# EAGLE board 10LED (EAGLE 6.4)
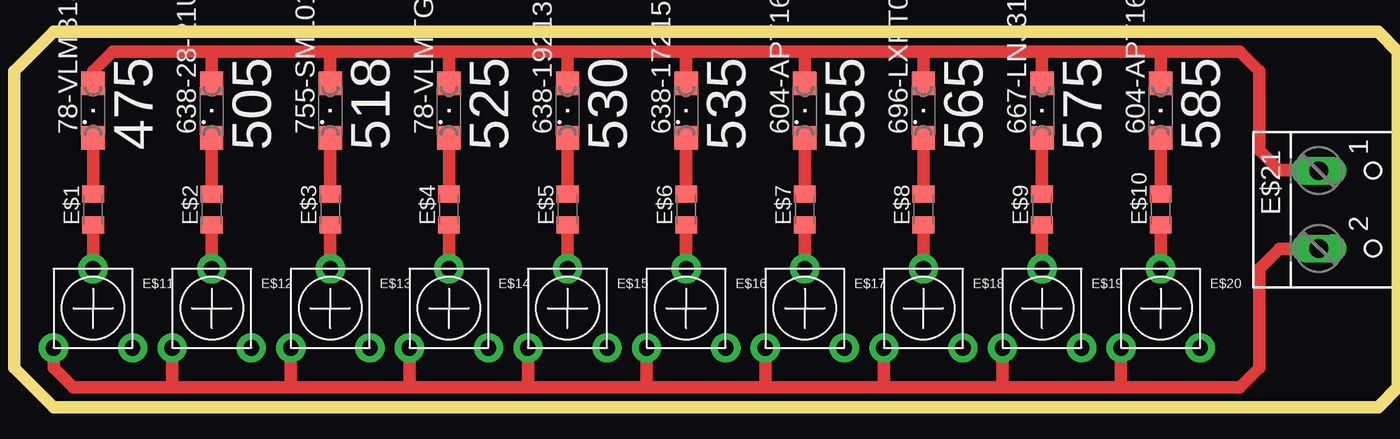
[diagram p0: board, top side]

No outline drawn. Coordinates in mm, seen from the top.
Copper layers (1*16): Top 0.035mm / dielectric 1.5mm / Bottom 0.035mm
Design rules "default": minimum track width 10mil, minimum drill 24mil, track to track 8mil, track to pad 8mil, pad to pad 8mil, via to via 8mil, smd to smd 8mil, copper to edge 40mil, drill to drill 8mil, minimum pad ring 10mil, minimum via ring 8mil, stop-mask expansion 4mil, vias tented up to drill 0mil, thermal gap 10mil
Milling: 8 lines

## Footprints (pad centres in the part's own frame; a part is rotated, then mirrored left to right if it is on the bottom)
SML1206 = smd 1.5 x 1.5: A 1.75,0; C -1.75,0
C0805K = smd 1.1 x 1.4: 1 -1,0; 2 1,0
TRIM_POT_PTH = drill 1 pad 1.88: 1 -2.54,-2.54; 2 0,2.54; 3 2.54,-2.54
W237-102 = drill 1.194 long: 1 -2.5,-1.27; 2 2.5,-1.27

## Placement (x,y rotation side)
78-VLMB1300-GS08  475  [SML1206]  8.89,12.7 90 top
78-VLMTG1300-GS08  525nm  [SML1206]  31.75,12.7 90 top
604-APT1608PGW  555  [SML1206]  54.61,12.7 90 top
604-APT1608PYW  585  [SML1206]  77.47,12.7 90 top
638-28-21UBGC  505nm  [SML1206]  16.51,12.7 90 top
638-17215GHCYR1S23T  535  [SML1206]  46.99,12.7 90 top
638-19213GHCXS1T1N3T  530  [SML1206]  39.37,12.7 90 top
667-LNJ314G83RA  575  [SML1206]  69.85,12.7 90 top
696-LXFT0603GC-TR  565  [SML1206]  62.23,12.7 90 top
755-SML012ECTT86  518nm  [SML1206]  24.13,12.7 90 top
E$1  [C0805K]  8.89,6.35 90 top
E$2  [C0805K]  16.51,6.35 90 top
E$3  [C0805K]  24.13,6.35 90 top
E$4  [C0805K]  31.75,6.35 90 top
E$5  [C0805K]  39.37,6.35 90 top
E$6  [C0805K]  46.99,6.35 90 top
E$7  [C0805K]  54.61,6.35 90 top
E$8  [C0805K]  62.23,6.35 90 top
E$9  [C0805K]  69.85,6.35 90 top
E$10  [C0805K]  77.47,6.35 90 top
E$11  [TRIM_POT_PTH]  8.89,0 0 top
E$12  [TRIM_POT_PTH]  16.51,0 0 top
E$13  [TRIM_POT_PTH]  24.13,0 0 top
E$14  [TRIM_POT_PTH]  31.75,0 0 top
E$15  [TRIM_POT_PTH]  39.37,0 0 top
E$16  [TRIM_POT_PTH]  46.99,0 0 top
E$17  [TRIM_POT_PTH]  54.61,0 0 top
E$18  [TRIM_POT_PTH]  62.23,0 0 top
E$19  [TRIM_POT_PTH]  69.85,0 0 top
E$20  [TRIM_POT_PTH]  77.47,0 0 top
E$21  [W237-102]  88.9,6.35 270 top

## Library data of the parts
78-VLMB1300-GS08 78-VLMTG1300-GS08 604-APT1608PGW 604-APT1608PYW 638-28-21UBGC 638-17215GHCYR1S23T 638-19213GHCXS1T1N3T 667-LNJ314G83RA 696-LXFT0603GC-TR 755-SML012ECTT86 = led
E$1-E$10 = adafruit
E$11-E$20 = SparkFun-Electromechanical
E$21 = con-wago-500

## Nets
S$11: E$11.2
S$12: E$12.2
S$13: E$13.2
S$14: E$14.2
S$15: E$15.2
S$16: E$16.2
S$17: E$17.2
S$18: E$18.2
S$19: E$19.2
S$20: E$20.2
S$21: E$11.1 E$12.1 E$13.1 E$14.1 E$15.1 E$16.1 E$17.1 E$18.1 E$19.1 E$20.1

## Tracks (layer width: path | path; a pad name or v marks a point on that pad's centre or on a via)
S$1
  Top 0.813: 8.89,11.43 8.89,7.62
S$2
  Top 0.813: 16.51,10.16 16.51,7.62
S$3
  Top 0.813: 24.13,10.16 24.13,7.62
S$4
  Top 0.813: 31.75,10.16 31.75,7.62
S$5
  Top 0.813: 39.37,10.16 39.37,7.62
S$6
  Top 0.813: 46.99,10.16 46.99,7.62
S$7
  Top 0.813: 54.61,10.16 54.61,7.62
S$8
  Top 0.813: 62.23,10.16 62.23,7.62
S$9
  Top 0.813: 69.85,10.16 69.85,7.62
S$10
  Top 0.813: 77.47,10.16 77.47,7.62
S$11
  Top 0.813: 8.89,5.08 E$11.2
S$12
  Top 0.813: 16.51,5.08 E$12.2
S$13
  Top 0.813: 24.13,5.08 E$13.2
S$14
  Top 0.813: 31.75,5.08 E$14.2
S$15
  Top 0.813: 39.37,5.08 E$15.2
S$16
  Top 0.813: 46.99,5.08 E$16.2
S$17
  Top 0.813: 54.61,5.08 E$17.2
S$18
  Top 0.813: 62.23,5.08 E$18.2
S$19
  Top 0.813: 69.85,5.08 E$19.2
S$20
  Top 0.813: 77.47,5.08 E$20.2
S$21
  Top 0.813: E$11.1 6.35,-3.81 7.62,-5.08 13.97,-5.08 | 13.97,-5.08 21.59,-5.08 | 21.59,-5.08 29.21,-5.08 | 29.21,-5.08 36.83,-5.08 | 36.83,-5.08 44.45,-5.08 | 44.45,-5.08 52.07,-5.08 | 52.07,-5.08 59.69,-5.08 | 59.69,-5.08 67.31,-5.08 | 67.31,-5.08 74.93,-5.08 | 74.93,-5.08 82.55,-5.08 83.82,-3.81 83.82,2.54 85.09,3.81 87.63,3.81 | E$12.1 13.97,-5.08 | E$13.1 21.59,-5.08 | E$14.1 29.21,-5.08 | E$15.1 36.83,-5.08 | E$16.1 44.45,-5.08 | E$17.1 52.07,-5.08 | E$18.1 59.69,-5.08 | E$19.1 67.31,-5.08 | E$20.1 74.93,-5.08
S$22
  Top 0.813: 8.89,15.24 10.16,16.51 16.51,16.51 | 16.51,16.51 24.13,16.51 | 24.13,16.51 31.75,16.51 | 31.75,16.51 39.37,16.51 | 39.37,16.51 46.99,16.51 | 46.99,16.51 54.61,16.51 | 54.61,16.51 62.23,16.51 | 62.23,16.51 69.85,16.51 | 69.85,16.51 77.47,16.51 | 77.47,16.51 82.55,16.51 83.82,15.24 83.82,10.16 85.09,8.89 87.63,8.89 | 16.51,15.24 16.51,16.51 | 24.13,13.97 24.13,16.51 | 31.75,13.97 31.75,16.51 | 39.37,13.97 39.37,16.51 | 46.99,13.97 46.99,16.51 | 54.61,13.97 54.61,16.51 | 62.23,13.97 62.23,16.51 | 69.85,13.97 69.85,16.51 | 77.47,13.97 77.47,16.51

## Text on the board
tPlace: 475 | 505 | 518 | 525 | 530 | 535 | 555 | 565 | 575 | 585